# Altium PCB HC-NBIOT_Single_lamp_controller-V1.2.PcbDoc (part 1 of 2)
Units mm, origin at the board's own origin, x right, y up, seen from the top; angles counter-clockwise.
Board outline 119.9 x 57.5 mm, 2 copper layers (Top Layer, Bottom Layer); 151 components, 104 nets, 484 pads, 495 vias.
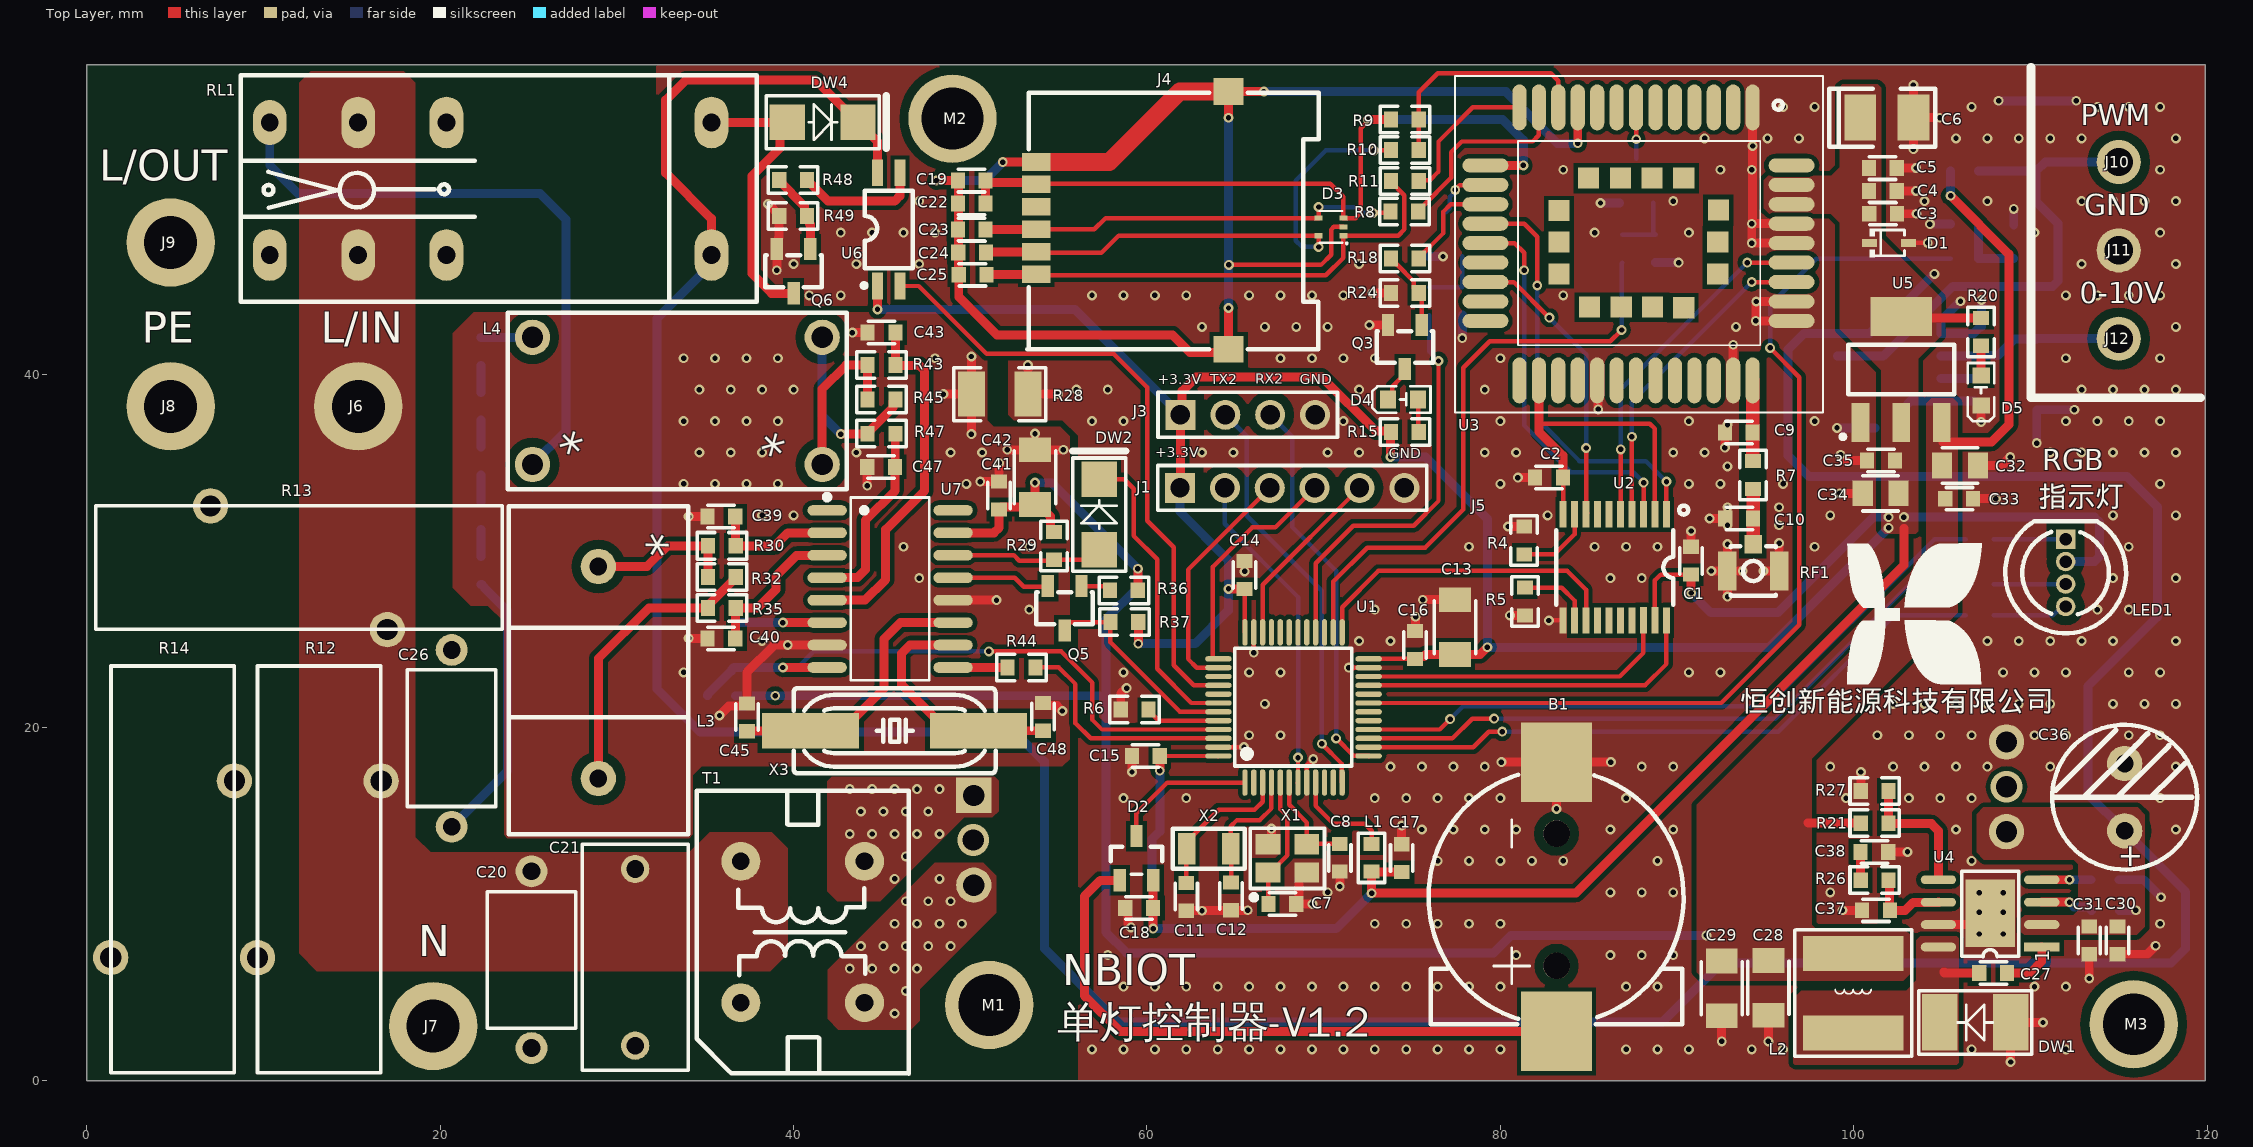
[diagram p0: Top Layer view]
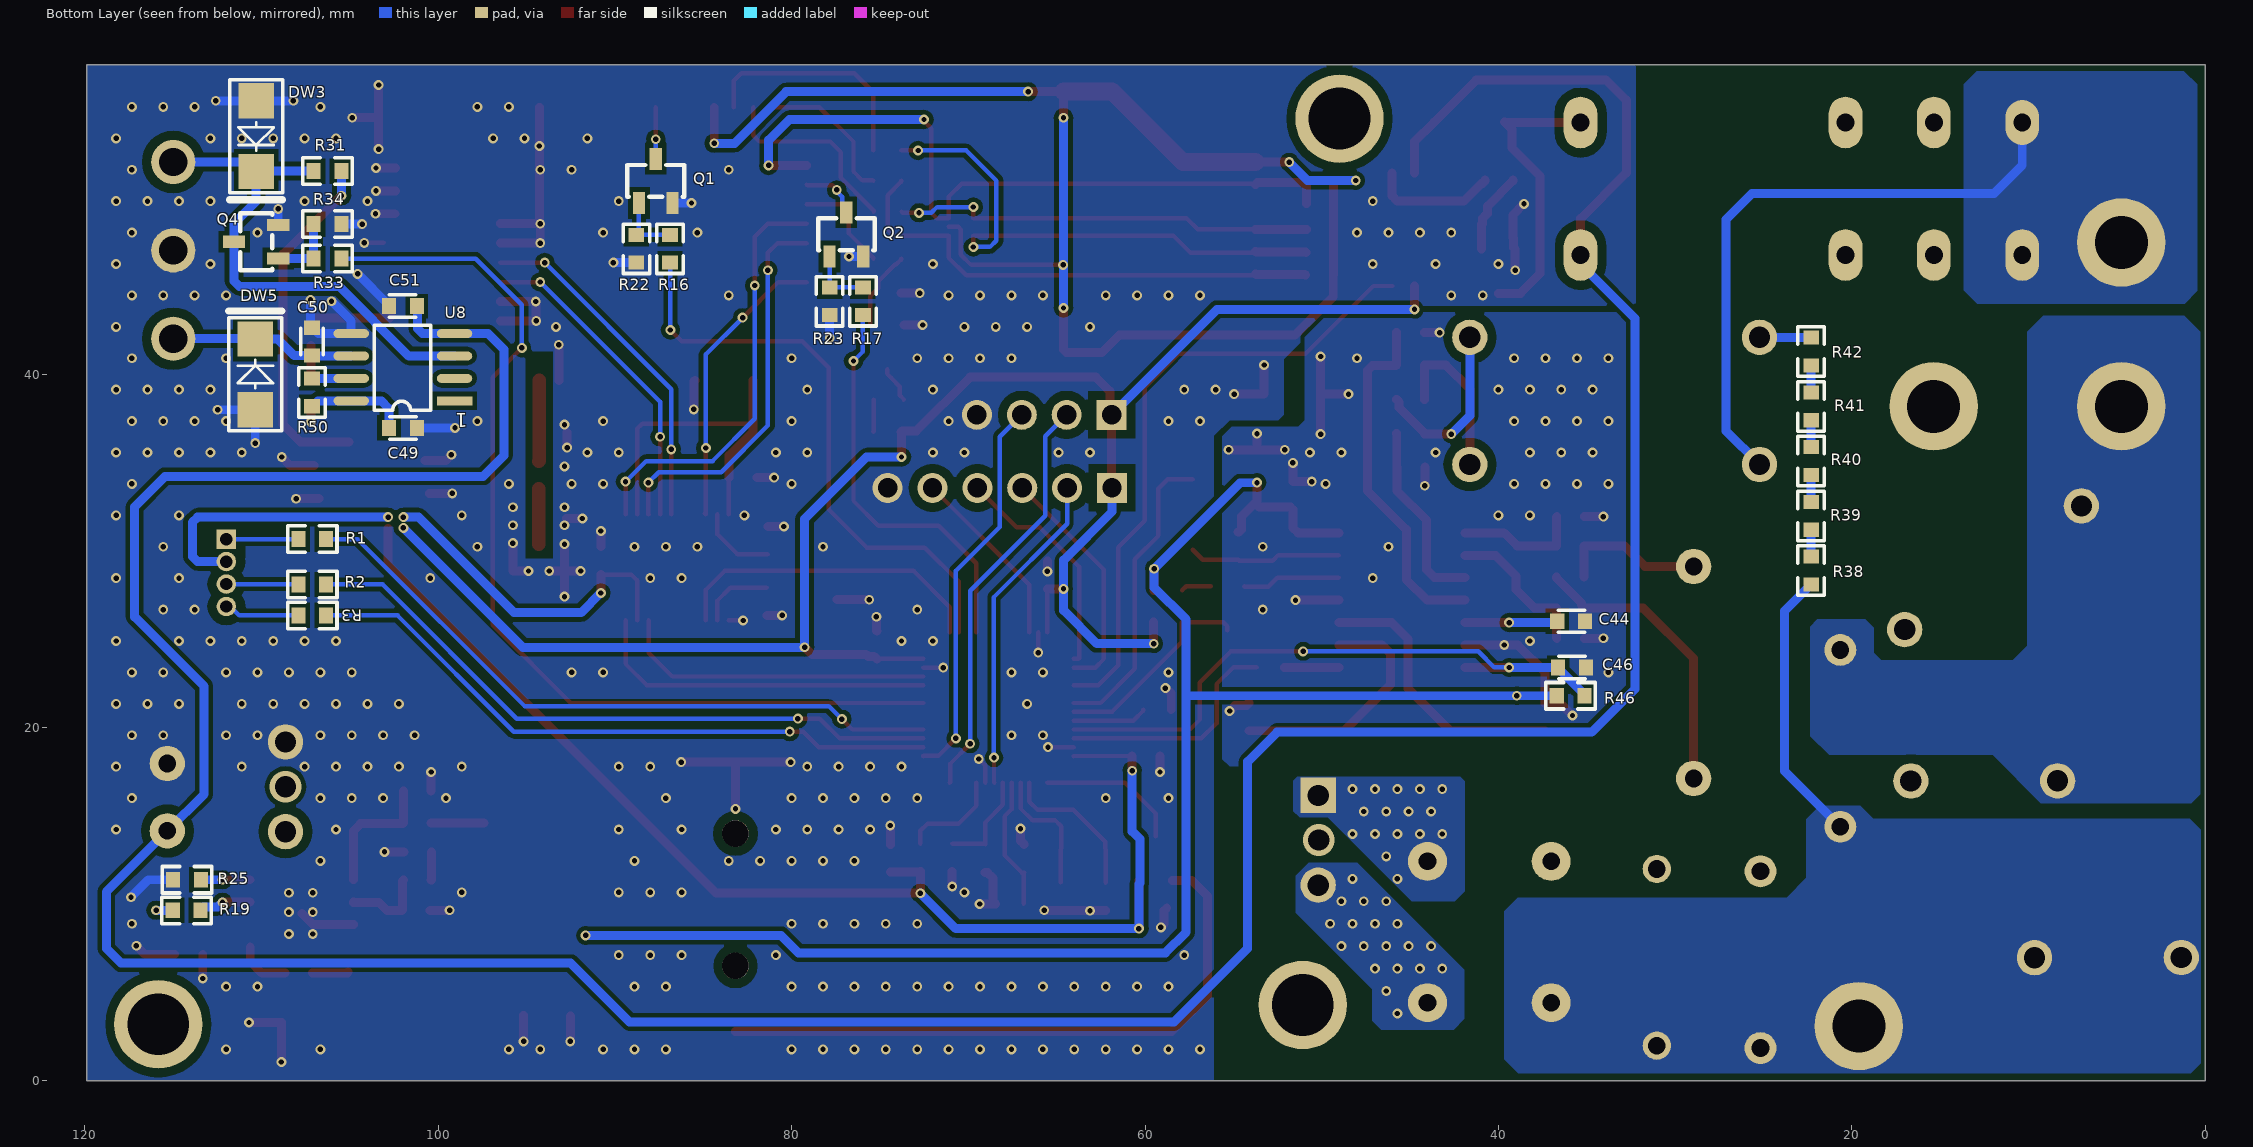
[diagram p1: Bottom Layer view, seen from below]
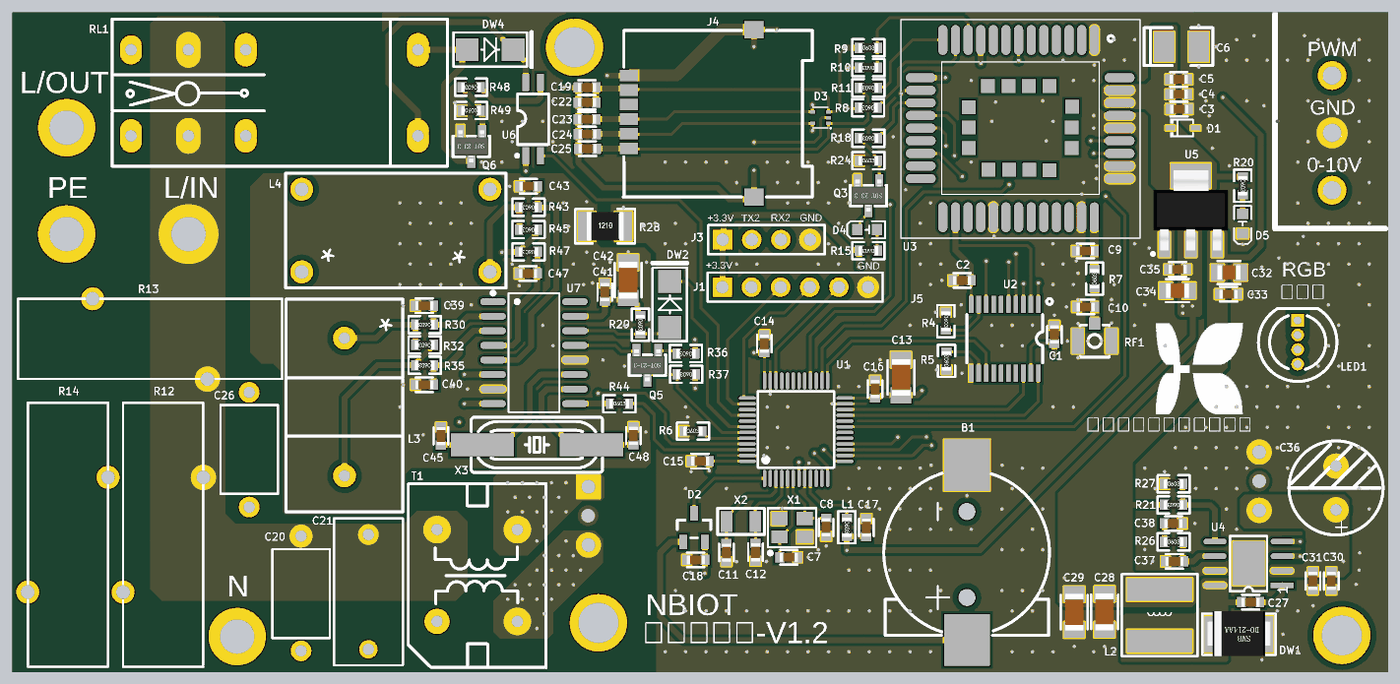
[diagram p3: 3D render of the assembled board from above, using the file's embedded part models]
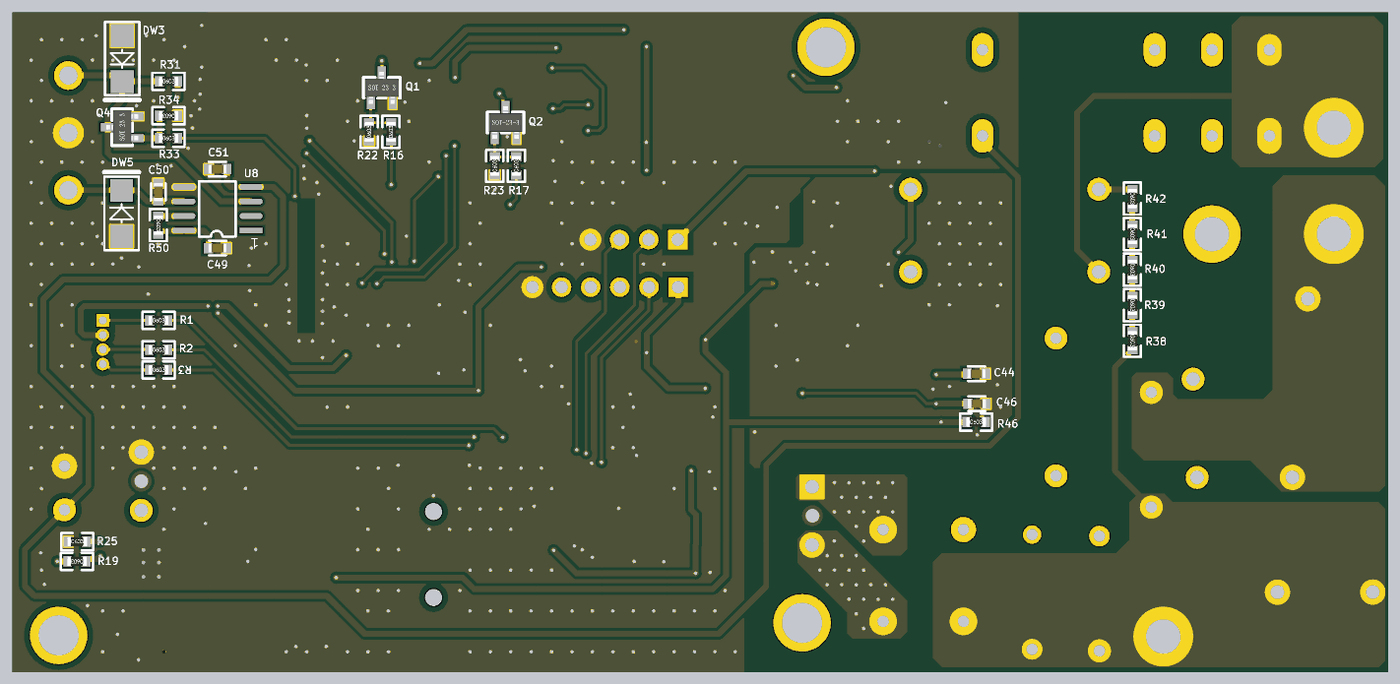
[diagram p4: 3D render of the assembled board from below, using the file's embedded part models]

## Layer stack, top to bottom
Top Solder: solder mask 0.0102, Solder Resist, Dk 3.5
Top Layer: signal copper 0.0356
Dielectric 1: dielectric 0.32, FR-4, Dk 4.8
Bottom Layer: signal copper 0.0356
Bottom Solder: solder mask 0.0102, Solder Resist, Dk 3.5

## Board outline
0,0 119.9,0 119.9,57.5 0,57.5

## Design rules (kind name [scope] priority, off if disabled: settings)
Clearance [All] p1: gap=0.152 ignorepadtopadclearanceinfootprint=FALSE except(0.254: Arc-Fill Arc-Poly Arc-Region Track-Fill Track-Poly Track-Region SMDPad-Fill SMDPad-Poly SMDPad-Region Via-Fill Via-Poly Via-Region Fill-Fill Fill-Poly Fill-Region Poly-Poly Poly-Region Region-Region; 0.508: THPad-Fill THPad-Poly THPad-Region)
HoleSize [All] p1: absolutevalues=TRUE maxlimit=3.5 minlimit=0.152 maxpercent=80.000 minpercent=20.000
MinimumSolderMaskSliver [All] p1: minsoldermaskwidth=0
PlaneConnect [All] p1: planeconnectstyle=Direct reliefexpansion=0.508 reliefentries=4 reliefconductorwidth=0.254 reliefairgap=0.254
PolygonConnect [All] p1: connectstyle=Direct reliefconductorwidth=0.254 reliefentries=4 polygonreliefangle="90 Angle" airgapwidth=0.254
RoutingVias [All] p1: holewidth=0.305 width=0.559 viastyle="Through Hole" minholewidth=0.305 minwidth=1.27 maxholewidth=0.711 maxwidth=1.27
SilkToSilkClearance [All] p1: silktosilkclearance=0
SilkToSolderMaskClearance [IsPad] p1: minsilkscreentomaskgap=0 clearancetoexposedcopper=TRUE
SolderMaskExpansion [All] p1: expansion=0.102 istentingtop=FALSE
Width [All] p1: maxlimit=2.54 minlimit=0.152 preferedwidth=0.254
25 further rules are at their usual default settings.

## Components (designator, comment, footprint, x,y, rotation, side; value= is the part's Value field where it differs from the comment)
B1 "CR1220-2" BAT-SMD_CR1220-2 83.185,10.414 r90 top
C1 "0.1uF" 0603C 90.805,29.439 r90 top
C2 "0.1uF" 0603C 82.753,34.138 r180 top
C3 "0.1uF" 0603C 101.675,49.073 r0 top
C4 "100pF" 0603C 101.649,50.368 r0 top
C5 "22pF" 0603C 101.649,51.664 r0 top
C6 "100uF" CAP-SMD_L3.5-W2.8 101.879,54.508 r0 top
C7 "22pF" 0603C 67.666,10.008 r180 top
C8 "22pF" 0603C 70.917,12.624 r90 top
C9 "NC" 0603C 93.497,36.703 r180 top
C10 "NC" 0603C 93.523,31.826 r180 top
C11 "10pF" 0603C 62.23,10.414 r270 top
C12 "10pF" 0603C 64.77,10.439 r270 top
C13 "10uF" 1206C 77.445,25.679 r270 top
C14 "0.1uF" 0603C 65.532,28.626 r270 top
C15 "0.1uF" 0603C 59.944,18.39 r0 top
C16 "0.1uF" 0603C 75.184,24.663 r270 top
C17 "0.1uF" 0603C 74.422,12.598 r270 top
C18 "0.1uF" 0603C 59.563,9.779 r0 top
C19 "0.1uF" 0603C 50.089,50.952 r0 top
C20 "1nF陶瓷电容/400V" 1NF/400V 25.171,11.854 r270 top
C21 "100nF安规电容（X2）" X2/100NF 31.039,1.989 r90 top
C22 "33pF" 0603C 50.089,49.657 r0 top
C23 "33pF" 0603C 50.089,48.184 r0 top
C24 "33pF" 0603C 50.114,46.888 r0 top
C25 "33pF" 0603C 50.14,45.618 r0 top
C26 "1nF陶瓷电容/400V" 1NF/400V 20.65,14.384 r90 top
C27 "0.1uF" 0603C 107.899,6.096 r180 top
C28 "47uF/16V" 1206C 95.174,5.258 r270 top
C29 "47uF/16V" 1206C 92.532,5.232 r270 top
C30 "0.1uF" 0603C 114.935,7.95 r90 top
C31 "4.7uF" 0603C 113.335,7.95 r90 top
C32 "10uF" 0805C 106.02,34.823 r180 top
C33 "100nF" 0603C 105.969,32.944 r180 top
C34 "10uF" 0805C 101.524,33.249 r0 top
C35 "100nF" 0603C 101.549,35.103 r0 top
C36 "220UF/25V" RAD-3R8 115.341,16.053 r90 top
C37 "22pF" 0603C 101.27,9.652 r0 top
C38 "3.3nF" 0603C 101.168,12.954 r180 top
C39 "33nF" 0603C 35.916,31.933 r0 top
C40 "33nF" 0603C 35.916,25.044 r0 top
C41 "0.1uF" 0603C 51.638,33.122 r270 top
C42 "10uF" 1206C 53.67,34.163 r270 top
C43 "33nF" 0603C 44.983,42.342 r0 top
C44 "0.1uF" 0603C 35.89,26.01 r0 bottom
C45 "22pF" 0603C 37.363,20.574 r270 top
C46 "0.1uF" 0603C 35.839,23.393 r180 bottom
C47 "33nF" 0603C 44.958,34.747 r0 top
C48 "22pF" 0603C 54.127,20.599 r270 top
C49 "1uF" 0603C 102.006,36.957 r0 bottom
C50 "1uF" 0603C 107.163,41.834 r270 bottom
C51 "1uF" 0603C 102.006,43.84 r180 bottom
D1 "ESD56181W04-2/TR" ESD56181W04 102.005,47.422 r0 top
D2 "MMBD4148CC" SOT-23-3 59.411,12.598 r270 top
D3 "ESDA6V8AV5" SOT-553_ESDA6V8AV5 70.423,48.328 r0 top
D4 "LED" LED0603 74.5,38.557 r0 top
D5 "LED" LED0603 107.213,39.079 r90 top
DW1 "B340A" SMB 106.883,3.302 r180 top
DW2 "SS34" SMA 57.302,32.048 r90 top
DW3 "SMAJ5.0A" SMA 110.312,53.467 r270 bottom
DW4 "SS34" SMA 41.649,54.254 r0 top
DW5 "SMAJ12A" SMA 110.363,39.98 r90 bottom
J1 "2.54-6P" 2.54-6P 65.684,33.553 r0 top
J3 "2.54_4P" 2.54-4P 65.71,37.694 r0 top
J4 "SIM-01A" SIM-01A 59.182,48.692 r270 top
J5 "WX-DC1205" WX-DC1205 47,0.55 r0 top locked
J6 "CON50X35裸板焊盘" SCREW5030 15.367,38.176 r0 top
J7 "CON50X35裸板焊盘" SCREW5030 19.609,3.099 r0 top
J8 "CON50X35裸板焊盘" SCREW5030 4.75,38.176 r0 top
J9 "CON50X35裸板焊盘" SCREW5030 4.75,47.447 r0 top
J10 "CON25X16裸板焊盘" SCREW2516 115,52 r0 top
J11 "CON25X16裸板焊盘" SCREW2516 115,47 r0 top
J12 "CON25X16裸板焊盘" SCREW2516 115,42 r0 top
L1 "GZ1608D601TF" 0603L 72.72,12.624 r270 top
L2 "SWPA6045S6R8MT" SDRH6D45 99.974,4.953 r180 top
L3 "DL-CT03C1.0 5A/5mA" "DL-CT03C1.0 5A/5MA" 28.956,23.109 r90 top
L4 "DL-PT202EA" DL-PT202EA 33.426,38.481 r0 top
LED1 "LED_RGB_5MM" LED_RGB_5MM 112,28.75 r90 top locked
M1 "定位孔" SCREW7035 51.079,4.293 r0 top
M2 "定位孔" SCREW7035 48.997,54.458 r0 top
M3 "定位孔" SCREW7035 115.849,3.2 r0 top
Q1 "MMBT3904" SOT-23 87.696,50.932 r270 bottom
Q2 "MMBT3904" SOT-23 76.911,47.904 r270 bottom
Q3 "MMBT3904" SOT-23 74.6,41.529 r90 top
Q4 "MMBT3904" SOT-23 110.312,47.488 r180 bottom
Q5 "SS8050" SOT-23 55.347,26.746 r90 top
Q6 "MMBT3904" SOT-23 40.005,45.822 r90 top
R1 "470R" 0603R 107.137,30.658 r180 bottom
R2 "330R" 0603R 107.137,28.092 r180 bottom
R3 "100R" 0603R 107.137,26.34 r180 bottom
R4 "51K" 0603R 81.356,30.582 r270 top
R5 "51K" 0603R 81.407,27.127 r90 top
R6 "10K" 0603R 59.309,21.006 r0 top
R7 "0R" 0603R 94.31,34.29 r90 top
R8 "22R" 0603R 74.574,49.2 r180 top
R9 "10K" 0603R 74.6,54.407 r0 top
R10 "22R" 0603R 74.6,52.68 r180 top
R11 "22R" 0603R 74.6,50.927 r180 top
R12 "压敏电阻20D561K" 20D561K 9.662,6.967 r90 top
R13 "压敏电阻20D561K" 20D561K 7.01,32.537 r0 top
R14 "压敏电阻20D561K" 20D561K 8.357,16.977 r270 top
R15 "4.7K" 0603R 74.6,36.728 r180 top
R16 "4.7K" 0603R 86.893,47.092 r90 bottom
R17 "4.7K" 0603R 75.971,44.12 r90 bottom
R18 "4.7K" 0603R 74.6,46.533 r180 top
R19 "100K" 0603R 114.249,9.652 r0 bottom
R20 "4.7K" 0603R 107.213,42.393 r270 top
R21 "53.6K" 0603R 101.194,14.58 r180 top
R22 "47K" 0603R 88.798,47.092 r90 bottom
R23 "47K" 0603R 77.851,44.12 r90 bottom
R24 "47K" 0603R 74.6,44.577 r0 top
R25 "200K" 0603R 114.224,11.379 r180 bottom
R26 "33.2K" 0603R 101.194,11.354 r0 top
R27 "10.2K" 0603R 101.194,16.408 r0 top
R28 "0R" 1210R 51.664,38.862 r0 top
R29 "10K" 0603R 54.737,30.277 r270 top
R30 "1K" 0603R 35.941,30.282 r180 top
R31 "1K" 0603R 106.274,51.486 r180 bottom
R32 "5.1R" 0603R 35.941,28.515 r180 top
R33 "4.7K" 0603R 106.274,46.533 r180 bottom
R34 "47K" 0603R 106.274,48.489 r0 bottom
R35 "1K" 0603R 35.941,26.748 r180 top
R36 "10K" 0603R 58.699,27.762 r180 top
R37 "10K" 0603R 58.725,25.959 r180 top
R38 "24K" 0603R 22.301,28.88 r270 bottom
R39 "24K" 0603R 22.301,31.979 r270 bottom
R40 "24K" 0603R 22.301,35.077 r270 bottom
R41 "24K" 0603R 22.301,38.176 r270 bottom
R42 "24K" 0603R 22.301,41.275 r270 bottom
R43 "1K" 0603R 44.983,40.512 r180 top
R44 "1K" 0603R 52.908,23.393 r0 top
R45 "100R" 0603R 44.983,38.568 r180 top
R46 "18K" 0603R 35.916,21.793 r180 bottom
R47 "1K" 0603R 44.983,36.623 r180 top
R48 "4.7K" 0603R 39.98,50.978 r180 top
R49 "47K" 0603R 39.98,48.946 r0 top
R50 "10K" 0603R 107.163,38.964 r270 bottom
RF1 "BWIPX-1-001E" IPEX一代天线座 94.31,28.854 r90 top
RL1 "NT751CZ200.415.0DC12V" G2R-2-24VDC 35.357,54.236 r180 top
T1 "共模电感" L-UU9.8 40.518,8.421 r90 top
U1 "STM32F103C8T6" STM32F103C8T6 68.301,21.133 r0 top
U2 "TXS0108EPWR" TXS0108EPWR 86.48,29.054 r180 top
U3 "BC26-NB-iot" BC26 97.761,56.491 r270 top
U4 "SCT2430A" SOIC8EP-1,27 107.721,9.474 r180 top
U5 "AMS1117-3.3V" SOT_223 102.692,40.259 r0 top
U6 "TLP281" SMD-4 45.39,48.184 r0 top
U7 "BL6523GX" SOP-16_BL6523GX 45.466,27.838 r270 top
U8 "GP8101" SOIC8-1,27 102.006,40.386 r0 bottom
X1 "8MHz" OSC-SMD_4P-25M 67.953,12.586 r0 top
X2 "32.768KHz" OSC-SMD_2P-32.768K 63.5,13.132 r180 top
X3 "3.58MHz" HC-49SMD_3.58M 45.72,19.812 r180 top

## Footprints (in the part's own frame and the unit in brackets; to place one, negate y for a bottom-side part, rotate by r counter-clockwise, add the part's x,y. Pads: shape width x height; smd on the part's side, far side on the other; paste and mask are expansions set on the pad)
1NF/400V [mm]
  round 1.8 hole 1: 1(0,0) 2(10,0)
  silkscreen extent 1.14,-2.5 8.89,2.5
2.54-4P [mm]
  rect 1.7x1.7 hole 1.1: 1(-3.81,0)
  round 1.7 hole 1.1: 2(-1.27,0) 3(1.27,0) 4(3.81,0)
  silkscreen extent -5.08,-1.27 5.08,1.27
2.54-6P [mm]
  rect 1.7x1.7 hole 1.1: 1(-3.81,0)
  round 1.7 hole 1.1: 2(-1.27,0) 3(1.27,0) 4(3.81,0) 5(6.35,0) 6(8.89,0)
  silkscreen extent -5.08,-1.27 10.16,1.27
20D561K [mm]
  round 2 hole 1.2: 1(0,0) 2(10,-7)
  silkscreen extent -6.5,-6.98 16.51,0
0603C [mm]
  rect 0.8x0.9 smd: 1(-0.787,0) 2(0.787,0)
  silkscreen extent -0.76,-0.64 0.74,0.64, body extent -0.8,-0.4 0.8,0.4, height 0.6
0603L [mm]
  rect 0.8x0.9 smd: 1(-0.787,0) 2(0.787,0)
  silkscreen extent -1.4,-0.75 1.4,0.75, body extent -0.85,-0.4 0.85,0.4, height 0.56
0603R [mm]
  rect 0.8x0.9 smd: 1(-0.787,0) 2(0.787,0)
  silkscreen extent -1.4,-0.75 1.4,0.75, body extent -0.85,-0.4 0.85,0.4, height 0.56
0805C [mm]
  rect 1.15x1.45 smd: 1(-1.016,0) 2(1.016,0)
  silkscreen extent -1,-1 1,1, body extent -1,-0.62 1,0.63, height 0.6
1206C [mm]
  rect 1.4x1.8 smd: 1(-1.55,0) 2(1.55,0)
  silkscreen extent -1.5,-1.17 1.5,1.17, body extent -1.6,-0.8 1.6,0.8, height 0.6
1210R [mm]
  rect 1.524x2.54 smd: 1(-1.6,0) 2(1.6,0)
  silkscreen extent -2.6,-1.5 2.6,1.5, body extent -1.6,-1.25 1.6,1.25, height 0.6
BAT-SMD_CR1220-2 [mm]
  rect 4.5x4 smd: 1(-7.62,0) 2(7.62,0)
  round 1.5 hole 1.5 unplated: ""(-3.912,0) ""(3.581,0)
  silkscreen extent -7.22,-7.19 6.92,7.25
BC26 [mm]
  oval 2.6x0.8 smd: 1(1.397,-3.475) 2(1.397,-4.575) 3(1.397,-5.675) 4(1.397,-6.775) 5(1.397,-7.875) 6(1.397,-8.975) 7(1.397,-10.075) 8(1.397,-11.175) 9(1.397,-12.275) 10(1.397,-13.375) 11(1.397,-14.475) 12(1.397,-15.575) 13(1.397,-16.675) 23(16.847,-16.675) 24(16.847,-15.575) 25(16.847,-14.475) 26(16.847,-13.375) 27(16.847,-12.275) 28(16.847,-11.175) 29(16.847,-10.075) 30(16.847,-8.975) 31(16.847,-7.875) 32(16.847,-6.775) 33(16.847,-5.675) 34(16.847,-4.575) 35(16.847,-3.475)
  oval 0.8x2.6 smd: 14(4.681,-18.6) 15(5.781,-18.6) 16(6.881,-18.6) 17(7.981,-18.6) 18(9.081,-18.6) 19(10.181,-18.6) 20(11.281,-18.6) 21(12.381,-18.6) 22(13.481,-18.6) 36(13.481,-1.273) 37(12.381,-1.273) 38(11.281,-1.273) 39(10.181,-1.273) 40(9.081,-1.273) 41(7.981,-1.273) 42(6.881,-1.273) 43(5.781,-1.273) 44(4.681,-1.273)
  rect 1.2x1.2 smd: 45(5.401,-7.381) 46(5.401,-9.181) 47(5.401,-10.959) 48(5.401,-12.759) 49(7.242,-14.434) 50(9.02,-14.434) 51(10.82,-14.434) 52(12.701,-12.718) 53(12.701,-10.918) 54(12.701,-9.14) 55(7.201,-5.415) 56(10.82,-5.451) 57(9.02,-5.451) 58(12.742,-7.376)
  silkscreen extent -0.38,-20.32 18.67,0.51
CAP-SMD_L3.5-W2.8 [mm]
  rect 1.8x2.6 smd: 1(-1.501,0) 2(1.501,0)
  silkscreen extent -3.26,-1.65 2.73,1.65
"DL-CT03C1.0 5A/5MA" [mm]
  round 2 hole 1: 1(5.999,0) 2(-5.999,0)
  silkscreen extent -9.14,-5.08 9.4,5.08
DL-PT202EA [mm]
  round 2 hole 1.2: 1(-8.199,-3.599) 2(-8.199,3.599) 3(8.199,3.599) 4(8.199,-3.599)
  silkscreen extent -9.6,-5 9.6,5
ESD56181W04 [mm]
  rect 0.845x0.455 smd: 1(-1.098,0) 2(1.098,0)
  silkscreen extent -1.1,-0.8 0.88,0.8
G2R-2-24VDC [mil]
  oval 75x115 hole 40: 1(0,0) 2(590.55,0) 3(787.4,0) 5(984.25,295.28) 6(787.4,295.28) 7(590.55,295.28) 8(0,295.28)
  oval 75x100 hole 40: 4(984.25,0)
  silkscreen extent -101,-105 1049,399, body extent -95,-105 1047,395, height 618
HC-49SMD_3.58M [mm]
  rect 5.5x2 smd: 1(-4.75,0) 2(4.75,0)
  silkscreen extent -5.71,-2.41 5.71,2.41
IPEX一代天线座 [mm]
  rect 1.05x1 smd: 1(1.524,0)
  rect 2.2x1.05 smd: 2(-0.001,1.475) 3(-0.001,-1.475)
  silkscreen extent -1.4,-1.27 1.4,1.27
L-UU9.8 [mm]
  round 2.2 hole 1: 1(-4,3.5) 2(-4,-3.5) 3(4,-3.5) 4(4,3.5)
  silkscreen extent -8.03,-6 8,6
LED0603 [mm]
  rect 0.9x1 smd: 1(-0.85,0) 2(0.85,0)
  silkscreen extent -1.75,-0.75 1.55,0.75
LED_RGB_5MM [mm]
  rect 1.1x1.1 hole 0.7: 1(1.905,0)
  round 1.1 hole 0.7: 2(0.635,0) 3(-0.635,0) 4(-1.905,0)
  silkscreen extent -3.42,-3.42 2.92,3.42
OSC-SMD_2P-32.768K [mm]
  rect 1x1.8 smd: 1(-1.25,0) 2(1.25,0)
  silkscreen extent -2.03,-1.14 2.03,1.14
OSC-SMD_4P-25M [mm]
  rect 1.4x1.15 smd: 1(-1.1,-0.8) 2(1.1,-0.8) 3(1.1,0.8) 4(-1.1,0.8)
  silkscreen extent -2.1,-2.35 2.1,1.7
RAD-3R8 [mm]
  round 2 hole 1: 1(-1.905,0) 2(1.905,0)
  silkscreen extent -4.1,-4.1 4.1,4.1
SCREW2516 [mm]
  round 2.5 hole 1.6: 1(0,0)
SCREW5030 [mm]
  round 5 hole 3: 1(0,0)
SCREW7035 [mm]
  round 5 hole 3.5: 1(0,0)
SDRH6D45 [mm]
  rect 5.7x2 smd: 1(0,2.25) 2(0,-2.25)
  silkscreen extent -3.3,-3.61 3.3,3.57
SIM-01A [mm]
  rect 1x1.6 smd: 1(-2.041,-5.44) 2(-3.311,-5.44) 3(0.499,-5.44) 4(-0.771,-5.44) 5(3.039,-5.44) 6(1.769,-5.44)
  rect 1.5x1.7 smd: 7(7.3,5.44) 8(-7.3,5.44)
  silkscreen extent -7.23,-5.94 7.28,10.54
SMA [mm]
  rect 2x2 smd: A(-2,0) K(2,0)
  silkscreen extent -3.2,-1.5 3.6,1.5
SMB [mm]
  rect 2x3.2 smd: A(-2,0) K(2,0)
  silkscreen extent -3.2,-1.8 3.2,1.8, body extent -2.8,-2 2.8,1.91, height 2.5
SMD-4 [mm]
  rect 0.6x1.5 smd: 1(-0.635,-3.2) 2(0.635,-3.2) 3(0.635,3.2) 4(-0.635,3.2)
  silkscreen extent -1.52,-3.3 1.35,2.2
SOIC8-1,27 [mm]
  rect 2x0.5 smd: 1(-2.925,1.905)
  oval 2x0.5 smd: 2(-2.925,0.635) 3(-2.925,-0.635) 4(-2.925,-1.905) 5(2.925,-1.905) 6(2.925,-0.635) 7(2.925,0.635) 8(2.925,1.905)
  silkscreen extent -1.58,-2.38 1.61,2.43
SOIC8EP-1,27 [mm]
  rect 2x0.5 smd: 1(-2.925,1.905)
  oval 2x0.5 smd: 2(-2.925,0.635) 3(-2.925,-0.635) 4(-2.925,-1.905) 5(2.925,-1.905) 6(2.925,-0.635) 7(2.925,0.635) 8(2.925,1.905)
  rect 2.8x3.82 smd: 9(0,0)
  silkscreen extent -1.61,-2.38 1.61,2.45
SOP-16_BL6523GX [mm]
  oval 0.602x2.231 smd: 1(-4.445,-3.565) 2(-3.175,-3.565) 3(-1.905,-3.565) 4(-0.635,-3.565) 5(0.635,-3.565) 6(1.905,-3.565) 7(3.175,-3.565) 8(4.445,-3.565) 9(4.445,3.565) 10(3.175,3.565) 11(1.905,3.565) 12(0.635,3.565) 13(-0.635,3.565) 14(-1.905,3.565) 15(-3.175,3.565) 16(-4.445,3.565)
  silkscreen extent -5.35,-3.71 5.18,2.22
SOT-23 [mm]
  rect 1.25x0.7 smd: 1(1.25,-0.95) 2(1.25,0.95) 3(-1.25,0)
  silkscreen extent -0.9,-1.6 0.9,1.6, body extent -1.4,-1.45 1.4,1.45, height 1.2
SOT-23-3 [mm]
  rect 1.25x0.7 smd: 1(1.25,-0.95) 2(1.25,0.95) 3(-1.25,0)
  silkscreen extent -0.65,-1.46 0.9,1.46
SOT-553_ESDA6V8AV5 [mm]
  rect 0.45x0.3 smd: 1(0.7,-0.5) 2(0.7,0) 3(0.7,0.5) 4(-0.7,0.5) 5(-0.7,-0.5)
  silkscreen extent -0.65,-0.98 0.94,0.9
SOT_223 [mm]
  rect 1x2.2 smd: 1(-2.3,-3) 2(0,-3) 3(2.3,-3)
  rect 3.5x2.2 smd: 4(0,3)
  silkscreen extent -3.43,-3.93 3,1.4, body extent -3.24,-3.49 3.24,3.49, height 1.64
STM32F103C8T6 [mm] "STM32F103C8T6"
  oval 0.3x1.5 smd: 1(-2.75,-4.25) 2(-2.25,-4.25) 3(-1.75,-4.25) 4(-1.25,-4.25) 5(-0.75,-4.25) 6(-0.25,-4.25) 7(0.25,-4.25) 8(0.75,-4.25) 9(1.25,-4.25) 10(1.75,-4.25) 11(2.25,-4.25) 12(2.75,-4.25) 25(2.75,4.25) 26(2.25,4.25) 27(1.75,4.25) 28(1.25,4.25) 29(0.75,4.25) 30(0.25,4.25) 31(-0.25,4.25) 32(-0.75,4.25) 33(-1.25,4.25) 34(-1.75,4.25) 35(-2.25,4.25) 36(-2.75,4.25)
  oval 1.5x0.3 smd: 13(4.25,-2.75) 14(4.25,-2.25) 15(4.25,-1.75) 16(4.25,-1.25) 17(4.25,-0.75) 18(4.25,-0.25) 19(4.25,0.25) 20(4.25,0.75) 21(4.25,1.25) 22(4.25,1.75) 23(4.25,2.25) 24(4.25,2.75) 37(-4.25,2.75) 38(-4.25,2.25) 39(-4.25,1.75) 40(-4.25,1.25) 41(-4.25,0.75) 42(-4.25,0.25) 43(-4.25,-0.25) 44(-4.25,-0.75) 45(-4.25,-1.25) 46(-4.25,-1.75) 47(-4.25,-2.25) 48(-4.25,-2.75)
  silkscreen extent -3.33,-3.31 3.3,3.34
TXS0108EPWR [mm]
  rect 0.4x1.494 smd: 1(-2.925,-3.001) 2(-2.275,-3.001) 3(-1.625,-3.001) 4(-0.975,-3.001) 5(-0.325,-3.001) 6(0.324,-3.001) 7(0.975,-3.001) 8(1.625,-3.001) 9(2.275,-3.001) 10(2.925,-3.001) 11(2.925,3.001) 12(2.275,3.001) 13(1.625,3.001) 14(0.975,3.001) 15(0.325,3.001) 16(-0.325,3.001) 17(-0.975,3.001) 18(-1.625,2.996) 19(-2.275,2.996) 20(-2.925,3.001)
  silkscreen extent -4.15,-3.5 3.3,2.1
WX-DC1205 [mm]
  rect 2x2 hole 1.2: 1(3.203,15.603)
  round 2 hole 1.2: 2(3.203,10.523) 3(61.65,13.548) 4(61.65,18.628)
X2/100NF [mm] "P=10mm"
  round 1.6 hole 1: 1(0,0) 2(10,0)
  silkscreen extent -1.4,-3 11.4,3

## Part data
B1: BOM_Manufacturer=Q&J, BOM_Manufacturer Part=CR1220-2, BOM_Supplier=LCSC, BOM_Supplier Part=C70381, image=//image.lceda.cn/szlcsc/C70381.jpg, spicePre=B, spiceSymbolName=CR1220-2
C1 C2 C3 C4 C5 C7 C8 C9 C10 C11 C12 C13 C14 C15 C16 C17 C18 C19 C21 C27 C30 C31 C37 C38 C39 C40 C41 C42 C43 C44 C45 C46 C47 C48 C49 C50 C51: library part 电容, "电容"
C6: library part Capacitor, "电解电容"
C20 C26 C28 C29: library part 多层陶瓷电容, "多层陶瓷电容"
C22 C23 C24 C25: library part CAP, "电容"
C32 C34: library part 1110204010, LatestRevisionDate=17-Jul-2002, LatestRevisionNote="Re-released for DXP Platform.", PackageDescription="Radial Cap, Thru-Hole; 2 Leads; 0.3 in Pin Spacing", PackageReference=RAD-0.3, Published=8-Jun-2000, Publisher="Altium Limited", 主计量单位名称=个, 存货名称=贴装叠层陶瓷电容, 存货编码=1110204010, 安全库存=305, 序号=745, 描述栏信息=同010203007, 旧编码=010203015, 旧规格型号="0805 10uF 10V ±10％ X7R", 规格型号=0805,10uF,10V,±10％,X7R
C33 C35: library part 1110203001, LatestRevisionDate=17-Jul-2002, LatestRevisionNote="Re-released for DXP Platform.", PackageDescription="Radial Cap, Thru-Hole; 2 Leads; 0.3 in Pin Spacing", PackageReference=RAD-0.3, Published=8-Jun-2000, Publisher="Altium Limited", 主计量单位名称=个, 存货名称=贴装叠层陶瓷电容, 存货编码=1110203001, 安全库存=593359, 序号=628, 旧编码=010202001, 旧规格型号="0603 100nF 50V ±10％ X7R", 规格型号=0603,100nF,50V,±10％,X7R
C36: library part 直插电解电容, "电解电容"
D1: library part TVS二极管, BOM_Manufacturer="WILLSEMI(Will Semicon)", BOM_Manufacturer Part=ESD56181W04-2/TR, BOM_Supplier=LCSC, BOM_Supplier Part=C910982, Contributor=LCSC, spicePre=D, spiceSymbolName=ESD56181W04-2/TR
D2: BOM_LCSC Assembly=Yes, BOM_Manufacturer=CJ, BOM_Manufacturer Part=MMBD4148CC, BOM_Supplier=LCSC, BOM_Supplier Part=C8595, image=//image.lceda.cn/szlcsc/C8595.jpg, SMT Type=Extend, spicePre=D, spiceSymbolName=MMBD4148CC_C8595
D3: BOM_Manufacturer="Will Semicon", BOM_Assembly Type=smtWeld, BOM_Manufacturer Part=ESDA6V8AV5, BOM_Paste Type=expand, BOM_Supplier=LCSC, BOM_Supplier Part=C268741, Contributor=LCSC, spicePre=D, spiceSymbolName=ESDA6V8AV5
D4 D5: library part 发光二极管
DW1 DW2 DW3 DW4 DW5: library part 肖特基二极管
J1: library part PIN_6P
J3: library part PIN_4P
J4: "SIM卡座"
J6 J7 J8 J9 J10 J11 J12: library part CON1X1
L1: library part INDUCTOR_FERRITE, "IND FER BEAD 120 OHM@100MHZ 0.5A 25% 0402", Tolerance=25%, AGILE_PN=180-77771, CAD_APPROVED=Yes, CLASS=DISCRETE, FPLIST=IND_0402,0402_CC, HEIGHT=0.55MM, MFG_NAME01=Murata, MFG_PN01=BLM15AG121SN1D, PART_TYPE=FERRITE\BEAD, ROHS=Yes
L2: library part 功率电感
L3: BOM_JLCPCB SMD=Yes, BOM_Manufacturer=ZEMING, BOM_Manufacturer Part=ZMCT102, BOM_Supplier=LCSC, BOM_Supplier Part=C84213, nameAlias=Value, SMT Type=Extend, spicePre=L, spiceSymbolName=ZMCT102
L4: BOM_Manufacturer=ZEMING, BOM_Manufacturer Part=ZMPT107-1, BOM_Supplier=LCSC, BOM_Supplier Part=C125191, nameAlias=Value, spicePre=L, spiceSymbolName=ZMPT107-1
LED1: library part LED_REB_5MM, BOM_JLCPCB SMD=Yes, BOM_Manufacturer=MEIHUA, BOM_Manufacturer Part=MHLA5319URGBDWT, BOM_Supplier=LCSC, BOM_Supplier Part=C417349, Contributor=LCSC, SMT Type=Extend, spicePre=L, spiceSymbolName=MHLA5319URGBDWT
Q5: library part MMBT3904
R1 R2 R3 R4 R5 R6 R7 R8 R9 R10 R11 R12 R13 R14 R15 R16 R17 R18 R19 R20 R21 R22 R23 R24 R25 R26 R27 R28 R29 R30 R31 R32 R33 R34 R35 R36 R37 R38 R39 R40 R41 R42 R43 R44 R45 R46 R47 R48 R49 R50: library part 电阻, "电阻"
  R4 R5 R7 R8 R9 R10 R11 R12 R13 R14 R15 R16 R17 R18 R19 R21 R22 R23 R24 R25 R27 R28 R29 R30 R31 R32 R33 R34 R35 R36 R37 R38 R39 R40 R41 R42 R43 R44 R45 R46 R47 R48 R49 R50: Text Field1=111-XXXX003-010-1, Text Field2=111-XXXX005-010-1, Text Field3=111-XXXX006-010-1
RF1: library part IPEX一代天线座, BOM_Manufacturer="BAT WIRELESS(蝙蝠无线)", BOM_Assembly Type=smtWeld, BOM_Manufacturer Part=BWIPX-1-001E, BOM_Paste Type=expand, BOM_Supplier=LCSC, BOM_Supplier Part=C496552, Contributor=LCSC, spicePre=R, spiceSymbolName=BWIPX-1-001E
RL1: library part Relay-SPDT, "Relay", LatestRevisionDate=17-Jul-2002, LatestRevisionNote="Re-released for DXP Platform.", PackageDescription="Relay; 8 Leads", PackageReference=DIP-P8, Published=24-Mar-1999, Publisher="Altium Limited"
U1: Manufacturer_Part_Number=stm32f103cxt2, < Value >=STM32F103C8T6, Copyright="Copyright (C) 2016 Accelerated Designs. All rights reserved", OriginalSymbolOrigin=(30000,20000), PackageName=stm32f103cxt2, Vendor=STMicroelectronics
U2: BOM_LCSC Assembly=Yes, BOM_Manufacturer=TI, BOM_Manufacturer Part=TXS0108EPWR, BOM_Supplier=LCSC, BOM_Supplier Part=C17206, image=//image.lceda.cn/szlcsc/C17206.jpg, SMT Type=Extend, spicePre=U, spiceSymbolName=TXS0108EPWR
U3: library part BC26
U4: library part TPS54331
U5: library part 1110404008, 主计量单位名称=片, 存货名称=电源, 存货编码=1110404008, 安全库存=1453, 序号=1933, 旧编码=010504010, 旧规格型号="AMS1117-3.3V SOT223-3 (1A)", 规格型号=AMS1117-3.3V,SOT223-3
U6: BOM_Manufacturer="Isocom Components", BOM_Manufacturer Part=TLP281, BOM_Supplier=LCSC, BOM_Supplier Part=C433437, Contributor=LCSC, spicePre=U, spiceSymbolName=TLP281
U7: BOM_JLCPCB SMD=Yes, BOM_Manufacturer="Shanghai Belling", BOM_Manufacturer Part=BL6523GX, BOM_Supplier=LCSC, BOM_Supplier Part=C213392, Contributor=LCSC, SMT Type=Extend, spicePre=U, spiceSymbolName=BL6523GX
U8: "PWM 2 ANALOG"
X1: library part "TSX-3225 25MHz 20pF 10ppm", BOM_LCSC Assembly=Yes, BOM_Manufacturer=EPSON, BOM_Manufacturer Part=X1E0000210352000G, BOM_Supplier=LCSC, BOM_Supplier Part=C91738, nameAlias=Frequency, SMT Type=Extend, spicePre=X, spiceSymbolName=X1E0000210352000G
X2 X3: library part "32.768kHz 20PPM 7pF", BOM_Manufacturer=SEIKO, BOM_Manufacturer Part=SC-32S32.768kHz20PPM7pF, BOM_Supplier=LCSC, BOM_Supplier Part=C97604, nameAlias=Frequency, spicePre=X, spiceSymbolName=SC-32S32.768kHz20PPM7pF

## Via types
v1: diameter 0.559, hole 0.305, Top Layer to Bottom Layer, tented both sides, 493 vias
v2: diameter 1.8, hole 1.2, Top Layer to Bottom Layer, 2 vias

## Nets (pads, with @x,y where several pads share a name; then routed paths per layer and width w, separated by ;. In a path a pad name is that pad's centre, name@x,y a point inside that pad or via, vN(x,y) a via of type N, cw(c..) or ccw(c..) an arc to the next point about the centre after c; other vN are vias at no path point)
+3.3VD: C1.1 C3.1 C4.1 C5.1 C6.1 C13.2 C14.2 C15.2 C16.2 C17.2 C18.2 C34.2 C35.2 D1.1 D2.2 J1.1 J3.1 L1.2 LED1.2 R15.2 R20.1 R37.1 U1.24 U1.36 U1.48 U2.19 U3.42 U3.43 U5.2 U5.4 U6.1 | length 217.8
  Top Layer w0.254: C15.2@60.731,18.39 60.738,18.383 U1.48@64.051,18.383 ; C14.2@65.532,27.838 65.551,27.82 U1.36@65.551,25.383 ; U1.24@72.551,23.883 75.177,23.883 C16.2@75.184,23.876 ; U2.19@88.755,26.058 88.755,28.329 89.078,28.651 C1.1@90.805,28.651
  Top Layer w0.508: v1(44.755,43.663) U6.1@44.755,44.984 ; v1(59.512,24.74) R37.1@59.512,25.959 ; v1(60.35,8.611) C18.2@60.35,9.779 60.355,9.784 60.355,11.344 D2.2@60.361,11.349 ; v1(60.731,17.551) C15.2@60.731,18.39 ; J1.1@61.874,33.553 61.9,33.579 J3.1@61.9,37.694 61.995,37.789 61.995,39.033 62.789,39.827 69.9,39.827 72.95,36.778 73.763,36.778 R15.2@73.812,36.728 73.797,36.713 73.797,35.316 v1(73.787,35.306) ; v1(64.618,27.838) C14.2@65.532,27.838 ; C17.2@74.422,11.811 74.409,11.824 72.733,11.824 L1.2@72.72,11.836 v1(72.72,10.617) 84.277,10.617 102.845,29.185 102.845,31.267 ; C16.2@75.184,23.876 75.33,24.022 75.675,24.022 75.783,24.129 C13.2@77.445,24.129 78.866,24.129 v1(79.273,24.536) ; v1(90.805,27.61) C1.1@90.805,28.651 ; U5.4@102.692,43.259 102.771,43.18 R20.1@107.213,43.18
  Bottom Layer w0.508: v1(44.755,43.663) 55.931,43.663 J3.1@61.9,37.694 ; v1(59.512,24.74) 62.738,24.74 64.618,26.619 64.618,29.464 61.874,32.207 J1.1@61.874,33.553 ; v1(60.731,17.551) 60.731,14.122 60.3,13.691 60.3,11.183 60.35,11.132 v1(60.35,8.611) 70.714,8.611 v1(72.72,10.617) ; v1(73.787,35.306) 75.768,35.306 79.273,31.801 v1(79.273,24.536) 95.225,24.536 v1(101.981,31.293) ; v1(90.805,27.61) 91.923,26.492 95.707,26.492 101.117,31.902 v1(101.981,31.902) ; v1(102.845,31.902) 113.621,31.902 113.919,31.605 113.919,29.683 113.621,29.385 LED1.2@112,29.385
+5VD: C28.1 C29.1 C32.2 C33.2 C41.2 C42.2 L2.2 R21.2 R29.1 R31.2 R36.1 R46.1 U5.3 U7.15 | length 118.4
  Top Layer w0.508: U7.15@49.031,31.013 51.341,31.013 51.638,31.311 C41.2@51.638,32.334 51.778,32.474 53.531,32.474 C42.2@53.67,32.613 ; v1(53.67,33.858) C42.2@53.67,32.613 ; R29.1@54.737,31.064 54.687,31.064 54.541,31.21 54.541,31.942 53.87,32.613 C42.2@53.67,32.613 ; R36.1@59.487,27.762 v1(59.487,28.981) ; 97.409,14.605 97.434,14.58 R21.2@100.406,14.58 ; 105.054,36.144 107.798,36.144 108.788,37.135 108.788,46.787 v1(105.486,50.089)
  Bottom Layer w0.508: R46.1@36.703,21.793 v1(38.964,21.793) 57.683,21.793 ; v1(53.67,33.858) 53.68,33.848 54.62,33.848 v1(59.487,28.981) 59.487,27.915 57.683,26.111 57.683,21.793 ; v1(91.669,8.23) 80.62,8.23 79.629,7.239 58.852,7.239 57.683,8.407 57.683,21.793 ; v1(105.486,50.089) R31.2@105.486,51.486
+12VD: C30.2 C31.2 C36.1 C51.2 DW4.K J5.3 R19.2 RL1.8 U4.2 U6.4 U8.4 | length 218.2
  Top Layer w0.508: RL1.8@35.357,46.736 35.357,48.793 32.766,51.384 32.766,55.499 33.909,56.642 41.262,56.642 DW4.K@43.649,54.254 44.755,53.149 U6.4@44.755,51.384
  Bottom Layer w0.508: RL1.8@35.357,46.736 35.357,46.228 32.283,43.155 32.283,22.174 34.722,19.736 52.527,19.736 54.204,18.059 54.204,7.493 58.369,3.327 89.179,3.327 92.507,6.655 117.958,6.655 118.796,7.493 118.796,10.693 C36.1@115.341,14.148 113.259,16.231 113.259,22.327 117.196,26.264 117.196,32.487 115.468,34.214 97.46,34.214 96.291,35.382 96.291,41.402 97.184,42.295 99.077,42.295 U8.4@99.081,42.291 100.896,42.291 101.194,42.589 101.194,43.815 C51.2@101.219,43.84 ; R19.2@115.037,9.652 v1(115.976,9.652)
AC220V_L: C20.1 C21.2 J6.1 R12.2 R13.2 RL1.3 RL1.6 T1.4
AC220V_L_OUT: J9.1 L4.1 RL1.4 RL1.5 | length 35.1
  Bottom Layer w0.508: RL1.4@10.357,54.236 10.357,51.822 11.963,50.216 25.654,50.216 27.127,48.743 27.127,36.782 L4.1@25.227,34.882
AC220V_N: C20.2 C21.1 C26.1 J7.1 R12.1 R14.2 R38.2 T1.1 | length 15.7
  Bottom Layer w0.508: C26.1@20.65,14.384 23.8,17.534 23.8,26.594 22.497,27.896 22.497,27.946 22.351,28.092 R38.2@22.301,28.092
AC220V_PE: C26.2 J8.1 R13.1 R14.1
AGND: C39.1 C40.1 C41.1 C42.1 C43.1 C44.1 C45.1 C46.2 C47.1 C48.1 R28.1 U7.7 U7.12 | length 28.8
  Top Layer w0.508: v1(34.061,25.044) C40.1@35.128,25.044 ; v1(34.061,31.933) C39.1@35.128,31.933 ; v1(35.814,20.676) 36.354,21.215 37.217,21.215 C45.1@37.363,21.361 37.363,23.114 38.903,24.654 39.665,24.654 v1(39.675,24.663) U7.7@41.901,24.663 ; v1(43.332,42.342) C43.1@44.196,42.342 ; v1(44.171,33.68) C47.1@44.171,34.747 ; v1(48.489,38.862) R28.1@50.064,38.862 ; U7.12@49.031,27.203 v1(51.486,27.203) ; v1(50.064,36.601) R28.1@50.064,38.862 ; v1(50.064,40.995) R28.1@50.064,38.862 ; v1(50.571,33.909) C41.1@51.638,33.909 v1(51.638,34.976) ; v1(52.095,35.713) C42.1@53.67,35.713 ; v1(53.67,36.627) C42.1@53.67,35.713 ; C48.1@54.127,21.387 54.273,21.241 54.908,21.241 v1(55.22,20.93) ; v1(55.27,35.713) C42.1@53.67,35.713
  other v1: 33.782,23.114 38.227,24.892 53.34,26.67 47.117,28.448 46.228,30.226 53.34,30.226 38.227,32.004 40.005,32.004 33.782,33.782 35.56,33.782 37.338,33.782 39.116,33.782 49.784,33.782 34.671,35.56 36.449,35.56 38.227,35.56 43.561,35.56 48.895,35.56 50.673,35.56 33.782,37.338 35.56,37.338 37.338,37.338 39.116,37.338 34.671,39.116 36.449,39.116 38.227,39.116 40.005,39.116 33.782,40.894 35.56,40.894 37.338,40.894 39.116,40.894 48.006,40.894
BL_CF: R44.2 U1.46 | length 13.3
  Top Layer w0.254: R44.2@53.696,23.393 55.016,23.393 55.956,22.454 55.956,20.244 56.817,19.383 U1.46@64.051,19.383
BL_nRST: C46.1 R46.2 U1.45 U7.8 | length 35.6
  Top Layer w0.254: v1(51.054,24.308) 55.143,24.308 56.921,22.53 56.921,20.422 57.46,19.883 U1.45@64.051,19.883
  Top Layer w0.508: v1(39.395,23.393) U7.8@41.901,23.393
  Bottom Layer w0.254: v1(39.395,23.393) 40.234,23.393 41.148,24.308 v1(51.054,24.308)
  Bottom Layer w0.508: R46.2@35.128,21.793 35.128,21.843 36.481,23.196 36.481,23.247 C46.1@36.627,23.393 v1(39.395,23.393)
BL_RX: DW2.A R29.2 U7.14 | length 8.6
  Top Layer w0.254: U7.14@49.031,29.743 52.476,29.743 52.781,29.439 54.686,29.439 R29.2@54.737,29.489 56.744,29.489 DW2.A@57.302,30.048
BL_TX: Q5.2 U7.13 | length 5.6
  Top Layer w0.254: U7.13@49.031,28.473 52.527,28.473 53.035,27.965 54.366,27.965 Q5.2@54.397,27.996
CLKIN: C45.2 U7.11 X3.2 | length 15.8
  Top Layer w0.508: C45.2@37.363,19.787 40.945,19.787 X3.2@40.97,19.812 42.72,19.812 45.11,22.202 45.11,24.994 46.05,25.933 U7.11@49.031,25.933
CLKOUT: C48.2 U7.10 X3.1 | length 14
  Top Layer w0.508: U7.10@49.031,24.663 46.584,24.663 46.101,24.181 46.101,22.431 48.72,19.812 C48.2@54.127,19.812